# Altium PCB PCB1.PcbDoc
Units mil, origin at the board's own origin, x right, y up, seen from the top; angles counter-clockwise.
Board outline 2755.91 x 2755.91 mil, 4 copper layers (Component Side, Ground Plane, Power Plane, Solder Side), stack 33.234 mil thick; 144 components, 134 nets, 828 pads, 0 vias.
Unrouted connection lines stored in the file: 545.
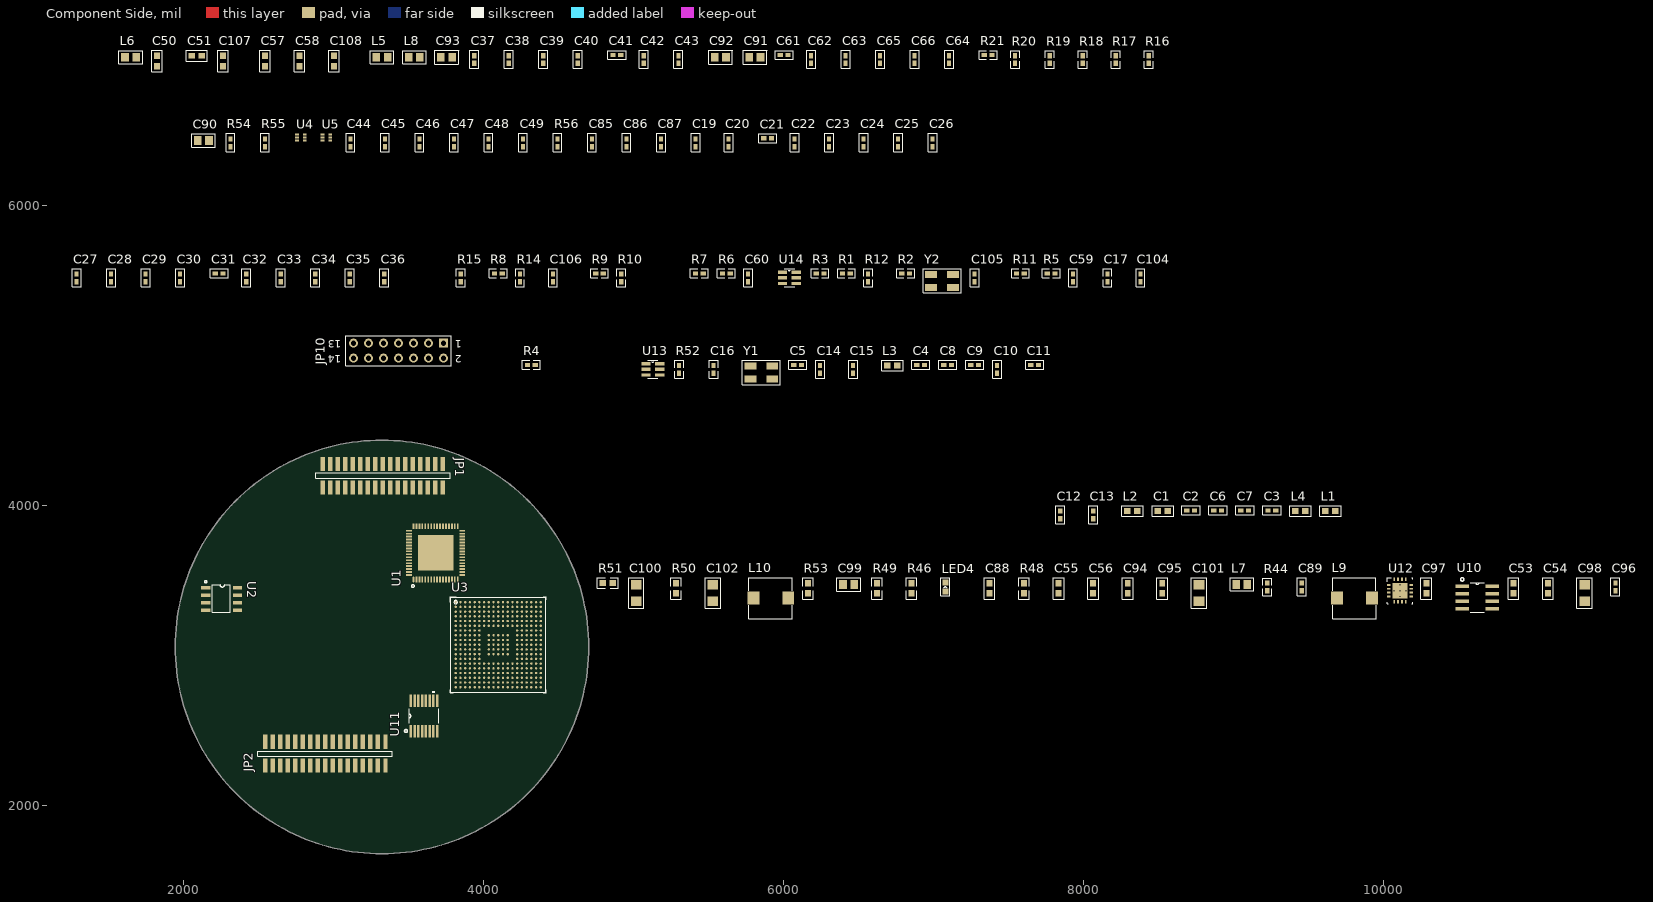
[diagram p0: Component Side view]
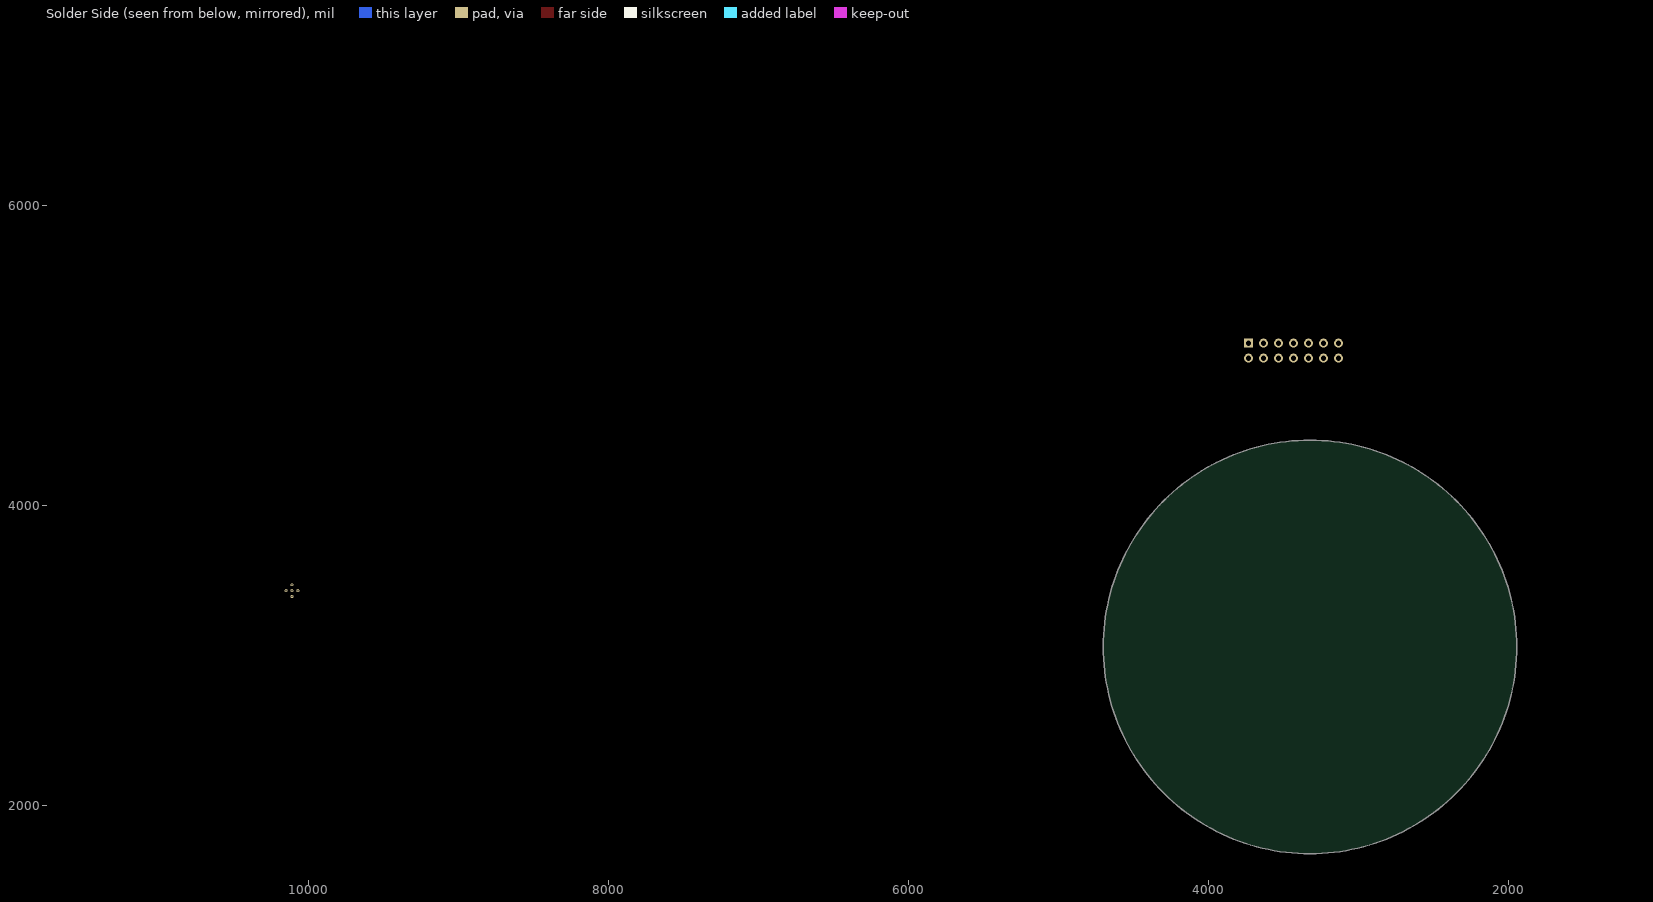
[diagram p1: Solder Side view, seen from below]
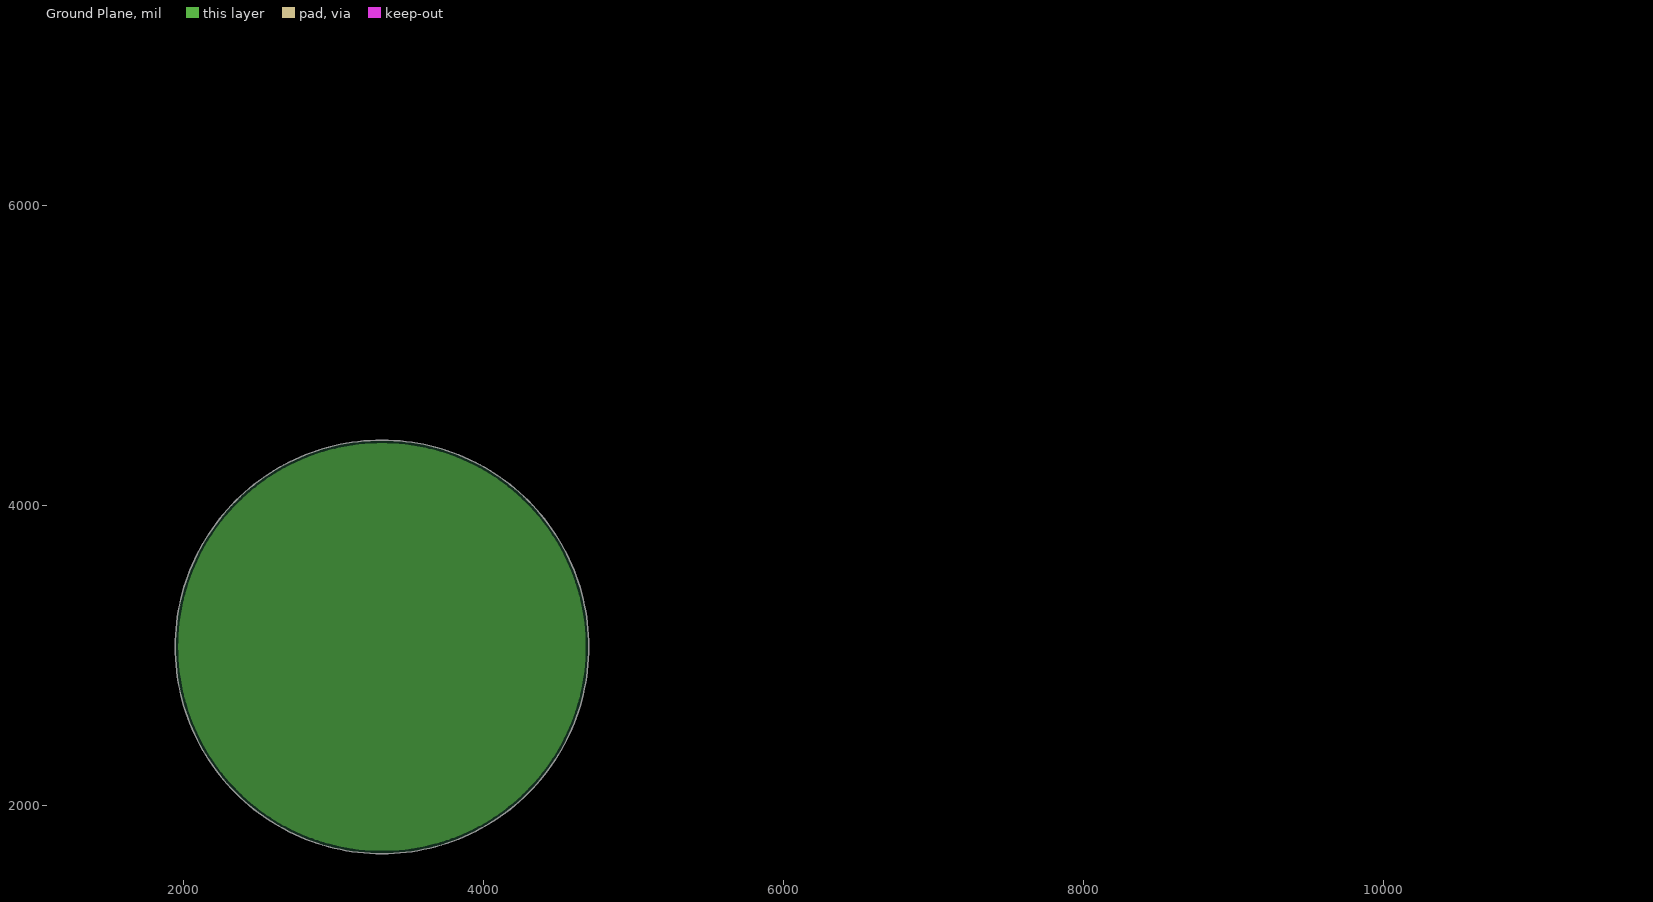
[diagram p2: Ground Plane, clearances drawn from the general rule]
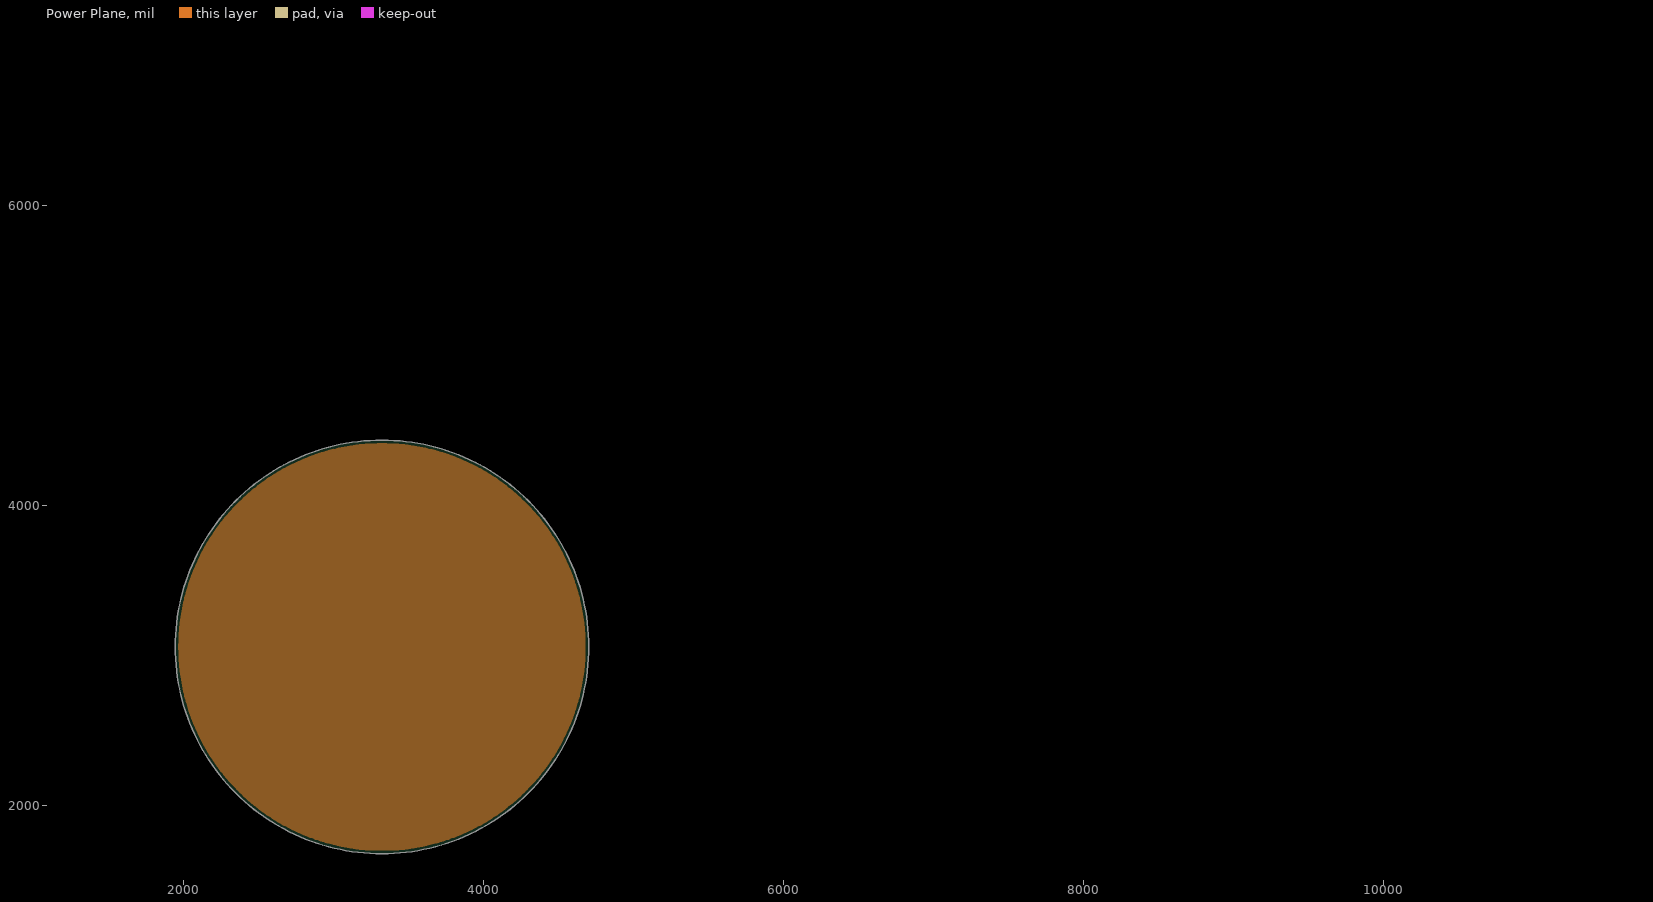
[diagram p3: Power Plane, clearances drawn from the general rule]

## Layer stack, top to bottom
Top Solder: solder mask 0.4, Solder Resist, Dk 3.5
Component Side: signal copper 1.4
Dielectric 1: core 12.6, FR-4, Dk 4.8
Ground Plane: plane copper 1.417
Dielectric 3: prepreg 5, Dk 4.2
Power Plane: plane copper 1.417
Dielectric 4: core 10, Dk 4.2
Solder Side: signal copper 1.4
Bottom Solder: solder mask 0.4, Solder Resist, Dk 3.5

## Board outline
1947.05,3060 ccw(c3325,3060) 3325,1682.05 ccw(c3325,3060) 4702.95,3060 ccw(c3325,3060) 3325,4437.95 ccw(c3325,3060)

## Design rules (kind name [scope] priority, off if disabled: settings)
Clearance [All] p1: gap=5
DiffPairsRouting [All] p1: maxlimit=10 minlimit=10 mostfreqgap=10 toplayer_minwidth=15 toplayer_maxwidth=15 toplayer_prefwidth=15 bottomlayer_minwidth=15 bottomlayer_maxwidth=15 bottomlayer_prefwidth=15 maxuncoupledlength=500
HoleToHoleClearance [All] p1: gap=0 allowstackedmicrovias=TRUE
MinimumSolderMaskSliver [All] p1: minsoldermaskwidth=0
PlaneClearance [All] p1: clearance=20
PlaneConnect [All] p1: planeconnectstyle=Relief reliefexpansion=20 reliefentries=4 reliefconductorwidth=10 reliefairgap=10
PolygonConnect [All] p1: connectstyle=Relief reliefconductorwidth=10 reliefentries=4 polygonreliefangle="90 Angle" airgapwidth=10
RoutingVias [All] p1: holewidth=28 width=50 viastyle="Through Hole" minholewidth=28 minwidth=50 maxholewidth=28 maxwidth=50
SilkToSilkClearance [All] p1: silktosilkclearance=0
SilkToSolderMaskClearance [IsPad] p1: minsilkscreentomaskgap=0 clearancetoexposedcopper=TRUE
SolderMaskExpansion [All] p1: expansion=4
Width [All] p1: maxlimit=40 minlimit=5 preferedwidth=10
23 further rules are at their usual default settings.

## Classes and differential pairs
differential pair RXA: +RXA_P -RXA_N
differential pair RXB: +RXB_P -RXB_N
differential pair TXA: +TXA_P -TXA_N
differential pair TXB: +TXB_P -TXB_N

## Components (designator, comment, footprint, x,y, rotation, side; value= is the part's Value field where it differs from the comment)
C1 "0603B105J6R3NT" CC1608-0603 8530,3965 r0 top
C2 "0402B471J6R3NT" CC1005-0402 8715,3970 r0 top
C3 "0402B104J6R3NT" CC1005-0402 9255,3970 r0 top
C4 "0402B104J6R3NT" CC1005-0402 6915,4940 r0 top
C5 "0402B104J6R3NT" CC1005-0402 6095,4940 r0 top
C6 "0402B104J6R3NT" CC1005-0402 8895,3970 r0 top
C7 "0402B104J6R3NT" CC1005-0402 9075,3970 r0 top
C8 "0402B104J6R3NT" CC1005-0402 7095,4940 r0 top
C9 "0402B104J6R3NT" CC1005-0402 7275,4940 r0 top
C10 "0402B104J6R3NT" CC1005-0402 7425,4910 r90 top
C11 "0402B104J6R3NT" CC1005-0402 7675,4940 r0 top
C12 "0402B104J6R3NT" CC1005-0402 7845,3940 r90 top
C13 "0402B104J6R3NT" CC1005-0402 8065,3940 r90 top
C14 "0402B104J6R3NT" CC1005-0402 6245,4910 r90 top
C15 "0402B104J6R3NT" CC1005-0402 6465,4910 r90 top
C16 "0402B180J6R3NT" CR1005-0402 5535,4910 r90 top
C17 "0402B180J6R3NT" CR1005-0402 8160,5520 r90 top
C19 "0402B104J6R3NT" CC1005-0402 5415,6420 r90 top
C20 "0402B104J6R3NT" CC1005-0402 5635,6420 r90 top
C21 "0402B104J6R3NT" CC1005-0402 5895,6450 r0 top
C22 "0402B104J6R3NT" CC1005-0402 6075,6420 r90 top
C23 "0402B104J6R3NT" CC1005-0402 6305,6420 r90 top
C24 "0402B104J6R3NT" CC1005-0402 6535,6420 r90 top
C25 "0402B104J6R3NT" CC1005-0402 6765,6420 r90 top
C26 "0402B104J6R3NT" CC1005-0402 6995,6420 r90 top
C27 "0402B104J6R3NT" CC1005-0402 1290,5520 r90 top
C28 "0402B104J6R3NT" CC1005-0402 1520,5520 r90 top
C29 "0402B104J6R3NT" CC1005-0402 1750,5520 r90 top
C30 "0402B104J6R3NT" CC1005-0402 1980,5520 r90 top
C31 "0402B104J6R3NT" CC1005-0402 2240,5550 r0 top
C32 "0402B104J6R3NT" CC1005-0402 2420,5520 r90 top
C33 "0402B104J6R3NT" CC1005-0402 2650,5520 r90 top
C34 "0402B104J6R3NT" CC1005-0402 2880,5520 r90 top
C35 "0402B104J6R3NT" CC1005-0402 3110,5520 r90 top
C36 "0402B104J6R3NT" CC1005-0402 3340,5520 r90 top
C37 "0402B104J6R3NT" CC1005-0402 3940,6975 r90 top
C38 "0402B104J6R3NT" CC1005-0402 4170,6975 r90 top
C39 "0402B104J6R3NT" CC1005-0402 4400,6975 r90 top
C40 "0402B104J6R3NT" CC1005-0402 4630,6975 r90 top
C41 "0402B104J6R3NT" CC1005-0402 4890,7005 r0 top
C42 "0402B104J6R3NT" CC1005-0402 5070,6975 r90 top
C43 "0402B104J6R3NT" CC1005-0402 5300,6975 r90 top
C44 "0402B104J6R3NT" CC1005-0402 3115,6420 r90 top
C45 "0402B104J6R3NT" CC1005-0402 3345,6420 r90 top
C46 "0402B104J6R3NT" CC1005-0402 3575,6420 r90 top
C47 "0402B104J6R3NT" CC1005-0402 3805,6420 r90 top
C48 "0402B104J6R3NT" CC1005-0402 4035,6420 r90 top
C49 "0402B104J6R3NT" CC1005-0402 4265,6420 r90 top
C50 "0603B106J6R3NT" CC1608-0603 1825,6965 r90 top
C51 "0603B106J6R3NT" CC1608-0603 2090,7000 r0 top
C53 "0603B225J6R3NT" CC1608-0603 10865,3450 r90 top
C54 "0603B225J6R3NT" CC1608-0603 11095,3450 r90 top
C55 "0603B225J6R3NT" CC1608-0603 7835,3450 r90 top
C56 "0603B225J6R3NT" CC1608-0603 8065,3450 r90 top
C57 "0603B106J6R3NT" CC1608-0603 2545,6965 r90 top
C58 "0603B106J6R3NT" CC1608-0603 2775,6965 r90 top
C59 "0402B150J6R3NT" CC1005-0402 7930,5520 r90 top
C60 "0402B150J6R3NT" CC1005-0402 5765,5520 r90 top
C61 "0402B104J6R3NT" CC1005-0402 6005,7005 r0 top
C62 "0402B104J6R3NT" CC1005-0402 6185,6975 r90 top
C63 "0402B104J6R3NT" CC1005-0402 6415,6975 r90 top
C64 "0402B104J6R3NT" CC1005-0402 7105,6975 r90 top
C65 "0402B104J6R3NT" CC1005-0402 6645,6975 r90 top
C66 "0402B104J6R3NT" CC1005-0402 6875,6975 r90 top
C85 "0402B104J6R3NT" CC1005-0402 4725,6420 r90 top
C86 "0402B104J6R3NT" CC1005-0402 4955,6420 r90 top
C87 "0402B104J6R3NT" CC1005-0402 5185,6420 r90 top
C88 "0603B105J6R3NT" CC1608-0603 7375,3450 r90 top
C89 "0402B104J6R3NT" CC1005-0402 9455,3460 r90 top
C90 "0805B226J6R3NT" CC2012-0805 2135,6435 r0 top
C91 "0805B226J6R3NT" CC2012-0805 5810,6990 r0 top
C92 "0805B226J6R3NT" CC2012-0805 5580,6990 r0 top
C93 "0805B226J6R3NT" CC2012-0805 3755,6990 r0 top
C94 "0603B105J6R3NT" CC1608-0603 8295,3450 r90 top
C95 "0603B105J6R3NT" CC1608-0603 8525,3450 r90 top
C96 "0402B104J6R3NT" CC1005-0402 11545,3460 r90 top
C97 "0603B225J6R3NT" CC1608-0603 10285,3450 r90 top
C98 "1206B156J6R3NT" CC3216-1206 11340,3420 r90 top
C99 "0805B474J6R3NT" CC2012-0805 6435,3475 r0 top
C100 "1206B156J6R3NT" CC3216-1206 5020,3420 r90 top
C101 "1206B226J6R3NT" CC3216-1206 8770,3420 r90 top
C102 "1206B336J6R3NT" CC3216-1206 5530,3420 r90 top
C104 "0402B103J6R3NT" CC1005-0402 8380,5520 r90 top
C105 "0402B104J6R3NT" CC1005-0402 7275,5520 r90 top
C106 "0402B104J6R3NT" CC1005-0402 4465,5520 r90 top
C107 "0603B106J6R3NT" CC1608-0603 2265,6965 r90 top
C108 "0603B106J6R3NT" CC1608-0603 3005,6965 r90 top
JP1 "Header 17X2" DC_1.27_32 3730,4280 r0 top
JP2 "Header 17X2" DC_1.27_32 2548,2270 r180 top
JP10 "JTAG" HDR2X7 3735,5085 r180 top
L1 "BLM18EG221SN1D" BLM0603 9645,3965 r0 top
L2 "BLM18EG221SN1D" BLM0603 8325,3965 r0 top
L3 "BLM18EG221SN1D" BLM0603 6725,4935 r0 top
L4 "BLM18EG221SN1D" BLM0603 9445,3965 r0 top
L5 "BLM21PG221SN1D" BLM0805 3325,6990 r0 top
L6 "BLM21PG600SN1D" BLM0805 1650,6990 r0 top
L7 "BLM21PG600SN1D" BLM0805 9055,3475 r0 top
L8 "BLM21PG221SN1D" BLM0805 3540,6990 r0 top
L9 "RLF7030T-1R0M6R4" RLF7030T 9690,3385 r0 top
L10 "RLF7030T-1R0M6R4" RLF7030T 5800,3385 r0 top
LED4 "LED Chip" 0603D 7080,3430 r90 top
R1 "RC02K1213JT" CR1005-0402 6420,5550 r0 top
R2 "RC02K6103JT" CR1005-0402 6815,5550 r0 top
R3 "RC02K6103JT" CR1005-0402 6245,5550 r0 top
R4 "RC02K6103JT" CR1005-0402 4320,4940 r0 top
R5 "RC02K6103JT" CR1005-0402 7785,5550 r0 top
R6 "RC02K6103JT" CR1005-0402 5620,5550 r0 top
R7 "RC02K6103JT" CR1005-0402 5440,5550 r0 top
R8 "RC02K6103JT" CR1005-0402 4100,5550 r0 top
R9 "RC02K202JT" CR1005-0402 4775,5550 r0 top
R10 "RC02K202JT" CR1005-0402 4920,5520 r90 top
R11 "RC02K390JT" CR1005-0402 7580,5550 r0 top
R12 "RC02K222JT" CR1005-0402 6565,5520 r90 top
R14 "RC02K563JT" CR1005-0402 4245,5520 r90 top
R15 "RC02K563JT" CR1005-0402 3850,5520 r90 top
R16 "RC02K000JT" CR1005-0402 8435,6975 r90 top
R17 "RC02K000JT" CR1005-0402 8215,6975 r90 top
R18 "RC02K000JT" CR1005-0402 7995,6975 r90 top
R19 "RC02K000JT" CR1005-0402 7775,6975 r90 top
R20 "RC02K000JT" CR1005-0402 7545,6975 r90 top
R21 "RC02K000JT" CR1005-0402 7365,7005 r0 top
R44 "RC02K102JT" CR1005-0402 9225,3460 r90 top
R46 "RC03K4R99JT" CR1608-0603 6855,3450 r90 top
R48 "RC03K3162JT" CR1608-0603 7605,3450 r90 top
R49 "RC03K103JT" CR1608-0603 6625,3450 r90 top
R50 "RC03K4991JT" CR1608-0603 5285,3450 r90 top
R51 "RC03K103JT" CR1608-0603 4830,3485 r0 top
R52 "RC02K222JT" CR1005-0402 5305,4910 r90 top
R53 "RC03K331JT" CR1608-0603 6165,3450 r90 top
R54 "RC02K472JT" CC1005-0402 2315,6420 r90 top
R55 "RC02K472JT" CC1005-0402 2545,6420 r90 top
R56 "RC02K220JT" CC1005-0402 4495,6420 r90 top
U1 "LAN9252" LAN9252 3535,3510 r90 top
U2 "24LC16B" "24LC16B SOIC8" 2150,3455 r270 top
U3 "TMS320F28377DZWT" TMS320F28377D 4100,3075 r0 top
U4 "TPD4E001_DRL_6" TPD4E001 2785,6455 r0 top
U5 "TPD4E001_DRL_6" TPD4E001 2955,6455 r0 top
U10 "REF5030_D_8" REF5030 10625,3390 r0 top
U11 "OPA4350_DBQ_16" OPA4350 3605,2600 r90 top
U12 "LM26420Q1" LM26420 10110,3435 r0 top
U13 "TPS3702CX33DDCR" TPS3702 5130,4910 r0 top
U14 "TPS3702CX33DDCR" TPS3702 6040,5520 r0 top
Y1 "25MHz" 7B-20MHz 5780,4845 r0 top
Y2 "XTAL1" 7B-20MHz 6985,5455 r0 top

## Footprints (in the part's own frame and the unit in brackets; to place one, negate y for a bottom-side part, rotate by r counter-clockwise, add the part's x,y. Pads: shape width x height; smd on the part's side, far side on the other; paste and mask are expansions set on the pad)
7B-20MHz [mm]
  rect 2x1.2 smd: 1(0,0) 2(3.7,0) 3(3.7,2.2) 4(0,2.2)
  silkscreen extent -1.37,-0.91 5.05,3.2
"24LC16B SOIC8" [mm]
  rect 0.6x1.55 smd: 1(0,0) 2(1.27,0) 3(2.54,0) 4(3.81,0) 5(3.81,5.4) 6(2.54,5.4) 7(1.27,5.4) 8(0,5.4)
  silkscreen extent -1.18,-0.18 4.19,4.19
0603D [mil]
  rect 40x40 smd: 1(0,0) 2(60,0)
  silkscreen extent -30,-30 90,30
BLM0603 [mm]
  rect 1.1x1 smd: 1(-0.85,0) 2(0.85,0)
  silkscreen extent -1.8,-0.9 1.86,0.9
BLM0805 [mm]
  rect 1.3x1.5 smd: 1(-0.95,0) 2(0.95,0)
  silkscreen extent -1.98,-1.07 2.01,1.14
CC1005-0402 [mm]
  rect 0.9x0.7 smd: 1(-0.65,0) 2(0.65,0)
  silkscreen extent -1.5,-0.75 1.57,0.75
CC1608-0603 [mm]
  rect 1.1x1 smd: 1(-0.85,0) 2(0.85,0)
  silkscreen extent -1.8,-0.9 1.83,0.9
CC2012-0805 [mm]
  rect 1.3x1.5 smd: 1(-0.95,0) 2(0.95,0)
  silkscreen extent -2,-1.15 2.03,1.15
CC3216-1206 [mm]
  rect 1.6x1.8 smd: 1(-1.4,0) 2(1.4,0)
  silkscreen extent -2.6,-1.3 2.59,1.3
CR1005-0402 [mm]
  rect 0.9x0.7 smd: 1(-0.65,0) 2(0.65,0)
  silkscreen extent -1.5,-0.75 1.5,0.75
CR1608-0603 [mm]
  rect 1.1x1 smd: 1(-0.85,0) 2(0.85,0)
  silkscreen extent -1.8,-0.9 1.8,0.9
DC_1.27_32 [mm]
  rect 0.74x2.4 smd: 1(0,0) 2(0,-4.013) 3(-1.27,0) 4(-1.27,-4.013) 5(-2.54,0) 6(-2.54,-4.013) 7(-3.81,0) 8(-3.81,-4.013) 9(-5.08,0) 10(-5.08,-4.013) 11(-6.35,0) 12(-6.35,-4.013) 13(-7.62,0) 14(-7.62,-4.013) 15(-8.89,0) 16(-8.89,-4.013) 17(-10.16,0) 18(-10.16,-4.013) 19(-11.43,0) 20(-11.43,-4.013) 21(-12.7,0) 22(-12.7,-4.013) 23(-13.97,0) 24(-13.97,-4.013) 25(-15.24,0) 26(-15.24,-4.013) 27(-16.51,0) 28(-16.51,-4.013) 29(-17.78,0) 30(-17.78,-4.013) 31(-19.05,0) 32(-19.05,-4.013) 33(-20.32,0) 34(-20.32,-4.013)
  silkscreen extent -21.51,-2.41 1.27,-1.52
HDR2X7 [mm] "Connector; Header; 7x2 Position"
  rect 1.5x1.5 hole 0.9: 1(0,0)
  round 1.5 hole 0.9: 2(0,2.54) 3(2.54,0) 4(2.54,2.54) 5(5.08,0) 6(5.08,2.54) 7(7.62,0) 8(7.62,2.54) 9(10.16,0) 10(10.16,2.54) 11(12.7,0) 12(12.7,2.54) 13(15.24,0) 14(15.24,2.54)
  silkscreen extent -1.27,-1.27 16.51,3.81
LAN9252 [mm]
  oct 1x0.3 smd: 1(0,0)
  rect 1x0.3 smd: 2(0,-0.5) 3(0,-1) 4(0,-1.5) 5(0,-2) 6(0,-2.5) 7(0,-3) 8(0,-3.5) 9(0,-4) 10(0,-4.5) 11(0,-5) 12(0,-5.5) 13(0,-6) 14(0,-6.5) 15(0,-7) 16(0,-7.5) 33(9,-7.5) 34(9,-7) 35(9,-6.5) 36(9,-6) 37(9,-5.5) 38(9,-5) 39(9,-4.5) 40(9,-4) 41(9,-3.5) 42(9,-3) 43(9,-2.5) 44(9,-2) 45(9,-1.5) 46(9,-1) 47(9,-0.5) 48(9,0)
  rect 0.3x1 smd: 17(0.75,-8.25) 18(1.25,-8.25) 19(1.75,-8.25) 20(2.25,-8.25) 21(2.75,-8.25) 22(3.25,-8.25) 23(3.75,-8.25) 24(4.25,-8.25) 25(4.75,-8.25) 26(5.25,-8.25) 27(5.75,-8.25) 28(6.25,-8.25) 29(6.75,-8.25) 30(7.25,-8.25) 31(7.75,-8.25) 32(8.25,-8.25) 49(8.25,0.75) 50(7.75,0.75) 51(7.25,0.75) 52(6.75,0.75) 53(6.25,0.75) 54(5.75,0.75) 55(5.25,0.75) 56(4.75,0.75) 57(4.25,0.75) 58(3.75,0.75) 59(3.25,0.75) 60(2.75,0.75) 61(2.25,0.75) 62(1.75,0.75) 63(1.25,0.75) 64(0.75,0.75)
  rect 6x6 smd: 65(4.5,-3.75)
  silkscreen extent -1.35,-0.13 -0.89,0.33
LM26420 [mm]
  rect 0.6x0.3 smd paste-0.102 mask+0.051: 1(-1.9,0.975) 2(-1.9,0.325) 3(-1.9,-0.325) 4(-1.9,-0.975) 9(1.9,-0.975) 10(1.9,-0.325) 11(1.9,0.325) 12(1.9,0.975)
  rect 0.3x0.6 smd paste-0.102 mask+0.051: 5(-0.975,-1.9) 6(-0.325,-1.9) 7(0.325,-1.9) 8(0.975,-1.9) 13(0.975,1.9) 14(0.325,1.9) 15(-0.325,1.9) 16(-0.975,1.9)
  round 0.5 / inner round 1.524 / far side round 0.5 hole 0.203 mask+0.051: 17(-1,0) 17(0,-1) 17(0,0) 17(0,1) 17(1,0)
  rect 2.6x2.6 smd paste-1.287 mask+0.051: 17(0,0)
  silkscreen extent -2.17,-2.17 2.17,2.17
OPA4350 [mil]
  rect 83x16 smd: 1(-102.5,87.5) 2(-102.5,62.5) 3(-102.5,37.5) 4(-102.5,12.5) 5(-102.5,-12.5) 6(-102.5,-37.5) 7(-102.5,-62.5) 8(-102.5,-87.5) 9(102.5,-87.5) 10(102.5,-62.5) 11(102.5,-37.5) 12(102.5,-12.5) 13(102.5,12.5) 14(102.5,37.5) 15(102.5,62.5) 16(102.5,87.5)
  silkscreen extent -110,-98 164,130
REF5030 [mil]
  rect 90x24 smd: 1(-99,75) 2(-99,25) 3(-99,-25) 4(-99,-75) 5(99,-75) 6(99,-25) 7(99,25) 8(99,75)
  silkscreen extent -111,-98 48,131
RLF7030T [mm]
  rect 2x2.2 smd: 1(0,0) 2(5.9,0)
  silkscreen extent -0.74,-3.5 6.62,3.5
TMS320F28377D [mm]
  round 0.4 smd paste+0 mask+0.051: A1(-7.2,7.2) A2(-6.4,7.2) A3(-5.6,7.2) A4(-4.8,7.2) A5(-4,7.2) A6(-3.2,7.2) A7(-2.4,7.2) A8(-1.6,7.2) A9(-0.8,7.2) A10(0,7.2) A11(0.8,7.2) A12(1.6,7.2) A13(2.4,7.2) A14(3.2,7.2) A15(4,7.2) A16(4.8,7.2) A17(5.6,7.2) A18(6.4,7.2) A19(7.2,7.2) B1(-7.2,6.4) B2(-6.4,6.4) B3(-5.6,6.4) B4(-4.8,6.4) B5(-4,6.4) B6(-3.2,6.4) B7(-2.4,6.4) B8(-1.6,6.4) B9(-0.8,6.4) B10(0,6.4) B11(0.8,6.4) B12(1.6,6.4) B13(2.4,6.4) B14(3.2,6.4) B15(4,6.4) B16(4.8,6.4) B17(5.6,6.4) B18(6.4,6.4) B19(7.2,6.4) C1(-7.2,5.6) C2(-6.4,5.6) C3(-5.6,5.6) C4(-4.8,5.6) C5(-4,5.6) C6(-3.2,5.6) C7(-2.4,5.6) C8(-1.6,5.6) C9(-0.8,5.6) C10(0,5.6) C11(0.8,5.6) C12(1.6,5.6) C13(2.4,5.6) C14(3.2,5.6) C15(4,5.6) C16(4.8,5.6) C17(5.6,5.6) C18(6.4,5.6) C19(7.2,5.6) D1(-7.2,4.8) D2(-6.4,4.8) D3(-5.6,4.8) D4(-4.8,4.8) D5(-4,4.8) D6(-3.2,4.8) D7(-2.4,4.8) D8(-1.6,4.8) D9(-0.8,4.8) D10(0,4.8) D11(0.8,4.8) D12(1.6,4.8) D13(2.4,4.8) D14(3.2,4.8) D15(4,4.8) D16(4.8,4.8) D17(5.6,4.8) D18(6.4,4.8) D19(7.2,4.8) E1(-7.2,4) E2(-6.4,4) E3(-5.6,4) E4(-4.8,4) E5(-4,4) E6(-3.2,4) E7(-2.4,4) E8(-1.6,4) E9(-0.8,4) E10(0,4) E11(0.8,4) E12(1.6,4) E13(2.4,4) E14(3.2,4) E15(4,4) E16(4.8,4) E17(5.6,4) E18(6.4,4) E19(7.2,4) F1(-7.2,3.2) F2(-6.4,3.2) F3(-5.6,3.2) F4(-4.8,3.2) F5(-4,3.2) F6(-3.2,3.2) F7(-2.4,3.2) F8(-1.6,3.2) F9(-0.8,3.2) F10(0,3.2) F11(0.8,3.2) F12(1.6,3.2) F13(2.4,3.2) F14(3.2,3.2) F15(4,3.2) F16(4.8,3.2) F17(5.6,3.2) F18(6.4,3.2) F19(7.2,3.2) G1(-7.2,2.4) G2(-6.4,2.4) G3(-5.6,2.4) G4(-4.8,2.4) G5(-4,2.4) G6(-3.2,2.4) G14(3.2,2.4) G15(4,2.4) G16(4.8,2.4) G17(5.6,2.4) G18(6.4,2.4) G19(7.2,2.4) H1(-7.2,1.6) H2(-6.4,1.6) H3(-5.6,1.6) H4(-4.8,1.6) H5(-4,1.6) H6(-3.2,1.6) H8(-1.6,1.6) H9(-0.8,1.6) H10(0,1.6) H11(0.8,1.6) H12(1.6,1.6) H14(3.2,1.6) H15(4,1.6) H16(4.8,1.6) H17(5.6,1.6) H18(6.4,1.6) H19(7.2,1.6) J1(-7.2,0.8) J2(-6.4,0.8) J3(-5.6,0.8) J4(-4.8,0.8) J5(-4,0.8) J6(-3.2,0.8) J8(-1.6,0.8) J9(-0.8,0.8) J10(0,0.8) J11(0.8,0.8) J12(1.6,0.8) J14(3.2,0.8) J15(4,0.8) J16(4.8,0.8) J17(5.6,0.8) J18(6.4,0.8) J19(7.2,0.8) K1(-7.2,0) K2(-6.4,0) K3(-5.6,0) K4(-4.8,0) K5(-4,0) K6(-3.2,0) K8(-1.6,0) K9(-0.8,0) K10(0,0) K11(0.8,0) K12(1.6,0) K14(3.2,0) K15(4,0) K16(4.8,0) K17(5.6,0) K18(6.4,0) K19(7.2,0) L1(-7.2,-0.8) L2(-6.4,-0.8) L3(-5.6,-0.8) L4(-4.8,-0.8) L5(-4,-0.8) L6(-3.2,-0.8) L8(-1.6,-0.8) L9(-0.8,-0.8) L10(0,-0.8) L11(0.8,-0.8) L12(1.6,-0.8) L14(3.2,-0.8) L15(4,-0.8) L16(4.8,-0.8) L17(5.6,-0.8) L18(6.4,-0.8) L19(7.2,-0.8) M1(-7.2,-1.6) M2(-6.4,-1.6) M3(-5.6,-1.6) M4(-4.8,-1.6) M5(-4,-1.6) M6(-3.2,-1.6) M8(-1.6,-1.6) M9(-0.8,-1.6) M10(0,-1.6) M11(0.8,-1.6) M12(1.6,-1.6) M14(3.2,-1.6) M15(4,-1.6) M16(4.8,-1.6) M17(5.6,-1.6) M18(6.4,-1.6) M19(7.2,-1.6) N1(-7.2,-2.4) N2(-6.4,-2.4) N3(-5.6,-2.4) N4(-4.8,-2.4) N5(-4,-2.4) N6(-3.2,-2.4) N14(3.2,-2.4) N15(4,-2.4) N16(4.8,-2.4) N17(5.6,-2.4) N18(6.4,-2.4) N19(7.2,-2.4) P1(-7.2,-3.2) P2(-6.4,-3.2) P3(-5.6,-3.2) P4(-4.8,-3.2) P5(-4,-3.2) P6(-3.2,-3.2) P7(-2.4,-3.2) P8(-1.6,-3.2) P9(-0.8,-3.2) P10(0,-3.2) P11(0.8,-3.2) P12(1.6,-3.2) P13(2.4,-3.2) P14(3.2,-3.2) P15(4,-3.2) P16(4.8,-3.2) P17(5.6,-3.2) P18(6.4,-3.2) P19(7.2,-3.2) R1(-7.2,-4) R2(-6.4,-4) R3(-5.6,-4) R4(-4.8,-4) R5(-4,-4) R6(-3.2,-4) R7(-2.4,-4) R8(-1.6,-4) R9(-0.8,-4) R10(0,-4) R11(0.8,-4) R12(1.6,-4) R13(2.4,-4) R14(3.2,-4) R15(4,-4) R16(4.8,-4) R17(5.6,-4) R18(6.4,-4) R19(7.2,-4) T1(-7.2,-4.8) T2(-6.4,-4.8) T3(-5.6,-4.8) T4(-4.8,-4.8) T5(-4,-4.8) T6(-3.2,-4.8) T7(-2.4,-4.8) T8(-1.6,-4.8) T9(-0.8,-4.8) T10(0,-4.8) T11(0.8,-4.8) T12(1.6,-4.8) T13(2.4,-4.8) T14(3.2,-4.8) T15(4,-4.8) T16(4.8,-4.8) T17(5.6,-4.8) T18(6.4,-4.8) T19(7.2,-4.8) U1(-7.2,-5.6) U2(-6.4,-5.6) U3(-5.6,-5.6) U4(-4.8,-5.6) U5(-4,-5.6) U6(-3.2,-5.6) U7(-2.4,-5.6) U8(-1.6,-5.6) U9(-0.8,-5.6) U10(0,-5.6) U11(0.8,-5.6) U12(1.6,-5.6) U13(2.4,-5.6) U14(3.2,-5.6) U15(4,-5.6) U16(4.8,-5.6) U17(5.6,-5.6) U18(6.4,-5.6) U19(7.2,-5.6) V1(-7.2,-6.4) V2(-6.4,-6.4) V3(-5.6,-6.4) V4(-4.8,-6.4) V5(-4,-6.4) V6(-3.2,-6.4) V7(-2.4,-6.4) V8(-1.6,-6.4) V9(-0.8,-6.4) V10(0,-6.4) V11(0.8,-6.4) V12(1.6,-6.4) V13(2.4,-6.4) V14(3.2,-6.4) V15(4,-6.4) V16(4.8,-6.4) V17(5.6,-6.4) V18(6.4,-6.4) V19(7.2,-6.4) W1(-7.2,-7.2) W2(-6.4,-7.2) W3(-5.6,-7.2) W4(-4.8,-7.2) W5(-4,-7.2) W6(-3.2,-7.2) W7(-2.4,-7.2) W8(-1.6,-7.2) W9(-0.8,-7.2) W10(0,-7.2) W11(0.8,-7.2) W12(1.6,-7.2) W13(2.4,-7.2) W14(3.2,-7.2) W15(4,-7.2) W16(4.8,-7.2) W17(5.6,-7.2) W18(6.4,-7.2) W19(7.2,-7.2)
  silkscreen extent -8.15,-8.15 8.15,8.15
TPD4E001 [mm]
  rect 0.654x0.301 smd: 1(-0.65,0.5) 2(-0.65,0) 3(-0.65,-0.5) 4(0.65,-0.5) 5(0.65,0) 6(0.65,0.5)
TPS3702 [mil]
  rect 62x22 smd paste-4 mask+2: 1(-46,37.4) 2(-46,0) 3(-46,-37.4) 4(46,-37.4) 5(46,0) 6(46,37.4)
  silkscreen extent -34,-60 34,60

## Part data
C1 C2 C3 C4 C5 C6 C7 C8 C9 C10 C11 C12 C13 C14 C15 C16 C17 C19 C20 C21 C22 C23 C24 C25 C26 C27 C28 C29 C30 C31 C32 C33 C34 C35 C36 C37 C38 C39 C40 C41 C42 C43 C44 C45 C46 C47 C48 C49 C50 C51 C53 C54 C55 C56 C57 C58 C59 C60 C61 C62 C63 C64 C65 C66 C85 C86 C87 C88 C89 C90 C91 C92 C93 C94 C95 C96 C97 C98 C99 C100 C101 C102 C104 C105 C106 C107 C108: library part CAP
JP1 JP2: "Header, 16-Pin, Dual row"
JP10: library part "Header 7X2", "Header, 7-Pin, Dual row"
L1 L2 L3 L4 L5 L6 L7 L8: library part "Inductor Iron", "Magnetic-Core Inductor"
L9 L10: library part "Inductor Chip", "Inductor"
LED4: "Typical Chip LED"
R1 R2 R3 R4 R5 R6 R7 R8 R9 R10 R11 R12 R14 R15 R16 R17 R18 R19 R20 R21 R44 R46 R48 R49 R50 R51 R52 R53 R54 R55 R56: library part Resistor
U3 U4 U5 U10 U11 U13 U14: "Imported"
U12: library part LM26420Q1XSQ/NOP, "Imported"
Y1: library part XTAL1

## Nets (pads, with @x,y where several pads share a name; then routed paths per layer and width w, separated by ;. In a path a pad name is that pad's centre, name@x,y a point inside that pad or via, vN(x,y) a via of type N, cw(c..) or ccw(c..) an arc to the next point about the centre after c; other vN are vias at no path point)
1V2: C57.1 C102.1 L8.1 L10.2 R50.2 U14.3
3V3: C8.2 C9.2 C10.2 C11.2 C12.2 C13.2 C50.1 C53.1 C55.1 C101.1 C105.1 C106.1 JP1.31 JP1.33 JP10.5 L1.1 L2.1 L3.1 L5.1 L6.1 L7.1 L9.2 LED4.1 R4.2 R9.2 R10.2 R48.2 R52.2 R54.2 R55.1 U1.5 U1.7 U1.14 U1.20 U1.32 U1.37 U1.47 U2.8 U13.3 U13.4 U13.5 U14.4 U14.5
5V0: C98.1 C100.1 JP1.32 JP1.34 R46.1 U12.1 U12.2 U12.11 U12.12 U12.13 U12.16
ADCA0: JP2.3 R16.1
ADCA1: JP2.6 R17.1
ADCA2: JP2.7 R18.1
ADCA3: JP2.4 R19.1
ADCA4: JP2.9 R20.1
ADCA5: JP2.5 R21.1
ADR1: U1.25 U3.A4
ADR2: U1.29 U3.T16
ADR3: U1.26 U3.W17
ADR4: U1.27 U3.V17
CAN_RX: JP1.30 U3.B2
CAN_TX: JP1.29 U3.C2
CAP1: JP2.18 U3.W9
CAP2: JP2.20 U3.V11
CAP3: JP2.16 U3.V9
CHIP_MODE0: JP1.11 R2.1 U1.48
CHIP_MODE1: JP1.13 R3.1 U1.46
CS: U1.28 U3.U14
DATA0: U1.17 U3.B11
DATA1: U1.13 U3.C14
DATA2: U1.12 U3.B14
DATA3: U1.35 U3.A14
DATA4: U1.49 U3.D15
DATA5: U1.50 U3.C15
DATA6: U1.36 U3.B15
DATA7: U1.39 U3.A15
DATA8: U1.40 U3.C16
DATA9: U1.19 U3.D16
DATA10: U1.23 U3.C17
DATA11: U1.22 U3.A16
DATA12: R14.2 U1.21 U3.B16
DATA13: U1.16 U3.B17
DATA14: U1.15 U3.A17
DATA15: U1.33 U3.B18
DC_CAL: JP1.17 U3.D1
DIGIN1: JP2.13 U3.V8
DIGIN2: JP2.29 U3.W16
DIGIN3: JP2.15 U3.V10
DIGIN4: JP2.31 U3.W18
DIGIN5: JP2.32 U3.V16
DIGIN6: JP2.22 U3.V12
DIGOUT1: JP2.17 U3.W10
DIGOUT2: JP2.19 U3.W11
EEPSIZE: R4.1 R5.1 U1.45
EESCL: R10.1 U1.43 U2.6
EESDA: R9.1 U1.42 U2.5
EMU0: JP10.13 R54.1
EMU1: JP10.14 R55.2
EN_GATE: JP1.27 U3.A2
ERROR: U3.U19
FXLOSEN: R6.1 U1.8
FXSDA: R7.1 U1.9
FXSDB: R8.1 U1.10
GND: C1.2 C2.2 C3.1 C4.1 C5.1 C6.1 C7.1 C8.1 C9.1 C10.1 C11.1 C12.1 C13.1 C14.1 C15.1 C16.1 C17.1 C19.1 C20.1 C21.1 C22.1 C23.1 C24.1 C25.1 C26.1 C27.1 C28.1 C29.1 C30.1 C31.1 C32.1 C33.1 C34.1 C35.1 C36.1 C37.2 C38.2 C39.2 C40.2 C41.2 C42.2 C43.2 C44.1 C45.1 C46.1 C47.1 C48.1 C49.1 C50.2 C51.2 C53.2 C54.2 C55.2 C56.2 C57.2 C58.2 C61.1 C62.1 C63.1 C64.1 C65.1 C66.1 C85.1 C86.1 C87.1 C88.1 C89.1 C90.1 C91.1 C92.1 C93.1 C94.1 C95.1 C96.1 C97.1 C98.2 C99.1 C100.2 C101.2 C102.2 C104.2 C105.2 C106.2 C107.2 C108.2 JP1.9 JP1.10 JP2.33 JP2.34 JP10.4 JP10.8 JP10.10 JP10.12 R1.1 R2.2 R3.2 R5.2 R6.2 R7.2 R8.2 R12.1 R49.2 R51.2 R53.1 U1.4 U1.41 U1.65 U2.1 U2.2 U2.3 U2.4 U2.7 U3.A1 U3.A10 U3.A19 U3.E5 U3.E6 U3.E8 U3.E12 U3.E14 U3.E15 U3.F5 U3.F6 U3.F8 U3.F12 U3.F14 U3.F15 U3.G16 U3.G17 U3.H8 U3.H9 U3.H10 U3.H11 U3.H12 U3.H14 U3.H15 U3.J5 U3.J6 U3.J8 U3.J9 U3.J10 U3.J11 U3.J12 U3.K8 U3.K9 U3.K10 U3.K11 U3.K12 U3.K14 U3.K15 U3.L5 U3.L6 U3.L8 U3.L9 U3.L10 U3.L11 U3.L12 U3.L18 U3.M8 U3.M9 U3.M10 U3.M11 U3.M12 U3.M14 U3.M15 U3.N1 U3.N5 U3.N6 U3.P1 U3.P2 U3.P5 U3.P7 U3.P8 U3.P11 U3.P12 U3.P14 U3.P15 U3.R2 U3.R5 U3.R7 U3.R8 U3.R14 U3.R15 U3.V6 U3.V7 U3.W1 U3.W6 U3.W7 U3.W19 U4.3 U5.3 U10.4 U11.13 U12.4 U12.9 U12.14 U12.17 U13.2 U14.2 Y1.2 Y1.4
GPIO84: R15.2 U3.A11
INH_A: JP1.20 U3.C8
INH_B: JP1.21 U3.A7
INH_C: JP1.24 U3.C7
INL_A: JP1.22 U3.D8
INL_B: JP1.23 U3.B7
INL_C: JP1.26 U3.D7
IRQ: U1.44 U3.T11
LED1: JP2.30 U3.U15
LED2: JP2.24 U3.U13
LED3: JP2.21 U3.U12
MCU_1V2: C37.1 C38.1 C39.1 C40.1 C41.1 C42.1 C43.1 C58.1 C108.1 L8.2 U3.E9 U3.E11 U3.F9 U3.F11 U3.G14 U3.G15 U3.J14 U3.J15 U3.K5 U3.K6 U3.P10 U3.P13 U3.R10 U3.R13
MCU_3V3: C19.2 C20.2 C21.2 C22.2 C23.2 C24.2 C25.2 C26.2 C27.2 C28.2 C29.2 C30.2 C31.2 C32.2 C33.2 C34.2 C35.2 C36.2 C44.2 C45.2 C51.1 C107.1 L5.2 R14.1 R15.1 U3.A9 U3.A18 U3.B1 U3.E7 U3.E10 U3.E13 U3.E16 U3.F4 U3.F7 U3.F10 U3.F13 U3.F16 U3.G4 U3.G5 U3.G6 U3.H5 U3.H6 U3.J18 U3.L14 U3.L15 U3.M1 U3.M5 U3.M6 U3.N14 U3.N15 U3.P9 U3.R9 U3.R11 U3.R12 U3.V19 U3.W8
MCU_TCK: JP2.27 JP10.11 R56.1 U3.V15
MCU_TDI: JP2.23 JP10.3 U3.W13
MCU_TDO: JP2.28 JP10.7 R11.1
MCU_TMS: JP2.26 JP10.1 U3.W14
MCU_TRST: JP2.25 JP10.2 R12.2 U3.V14
NetC16_2: C16.2 U1.1 Y1.1
NetC17_2: C17.2 U1.2 Y1.3
NetC59_1: C59.1 U3.G19 Y2.1
NetC60_1: C60.1 U3.J19 Y2.3
NetC61_2: C61.2 R21.2 U3.T3 U4.1
NetC62_2: C62.2 R17.2 U3.T1 U4.2
NetC63_2: C63.2 R19.2 U3.T2 U4.4
NetC64_2: C64.2 R16.2 U3.U1 U5.4
NetC65_2: C65.2 R20.2 U3.U3 U5.1
NetC66_2: C66.2 R18.2 U3.U2 U5.2
NetC88_2: C88.2 U10.5
NetC94_2: C94.2 R44.1 U10.6
NetC99_2: C99.2 R46.2 U12.15
NetL9_1: L9.1 U12.3
NetL10_1: L10.1 U12.10
NetLED4_2: LED4.2 R53.2
NetR1_2: R1.2 U1.57
NetR11_2: R11.2 U3.W15
NetR48_1: R48.1 R49.1 U12.5
NetR50_1: R50.1 R51.1 U12.8
NFAULT: JP1.18 U3.D2
NOCTW: JP1.19 U3.C1
OSC_GND: C59.2 C60.2 U3.H18 U3.H19 Y2.2 Y2.4
OSC_MCU_3V3: C48.2 C49.2 C56.1 L7.2 U3.H16 U3.H17
QEP1A: JP2.12 U3.R18
QEP1B: JP2.14 U3.R19
QEP1I: JP2.8 U3.P17
QEP1S: JP2.10 U3.P16
RD: U1.31 U3.U16
REF3V0: C95.2 R44.2 U11.3 U11.5 U11.12 U11.14
RST: C104.1 R52.1 U1.11 U3.F19 U13.1 U14.1
RXA_N: JP1.3 U1.54
RXA_P: JP1.1 U1.55
RXB_N: JP1.4 U1.61
RXB_P: JP1.2 U1.60
SCI_RXD: JP1.28 U3.A3
SCI_TXD: JP1.25 U3.B4
SPIA_CLK: JP1.14 U3.E3
SPIA_CS: JP1.15 U3.E4
SPIA_SIMO: JP1.16 U3.E1
SPIA_SOMI: JP1.12 U3.E2
SYNC0: U1.34 U3.D6
SYNC1: U1.18 U3.B19
TCK_RET: JP10.9 R56.2
TXA_N: JP1.7 U1.52
TXA_P: JP1.5 U1.53
TXB_N: JP1.8 U1.63
TXB_P: JP1.6 U1.62
VDD12TX1: C6.2 C7.2 L4.2 U1.56 U1.59
VDD33BIAS: C5.2 L3.2 U1.58
VDD33TXRX1: C3.2 L1.2 U1.51
VDD33TXRX2: C4.2 L2.2 U1.64
VDDA_MCU_3V3: C46.2 C47.2 C54.1 C85.2 C86.2 C87.2 C89.2 C96.2 C97.2 L6.2 U3.P6 U3.R6 U4.6 U5.6 U10.2 U11.4
VDDCR: C1.1 C2.1 C14.2 C15.2 L4.1 U1.6 U1.24 U1.38
VREFHIA: C90.2 U3.V1 U11.10 U11.11
VREFHIB: C91.2 U3.W5 U11.1 U11.2
VREFHIC: C92.2 U3.R1 U11.15 U11.16
VREFHID: C93.2 U3.V5 U11.6 U11.7
WR: U1.30 U3.U11
pads on no net: JP2.1 JP2.2 JP2.11 JP10.6 U1.3 U3.A5 U3.A6 U3.A8 U3.A12 U3.A13 U3.B3 U3.B5 U3.B6 U3.B8 U3.B9 U3.B10 U3.B12 U3.B13 U3.C3 U3.C4 U3.C5 U3.C6 U3.C9 U3.C10 U3.C11 U3.C12 U3.C13 U3.C18 U3.C19 U3.D3 U3.D4 U3.D5 U3.D9 U3.D10 U3.D11 U3.D12 U3.D13 U3.D14 U3.D17 U3.D18 U3.D19 U3.E17 U3.E18 U3.E19 U3.F1 U3.F2 U3.F3 U3.F17 U3.F18 U3.G1 U3.G2 U3.G3 U3.G18 U3.H1 U3.H2 U3.H3 U3.H4 U3.J1 U3.J2 U3.J3 U3.J4 U3.J16 U3.J17 U3.K1 U3.K2 U3.K3 U3.K4 U3.K16 U3.K17 U3.K18 U3.K19 U3.L1 U3.L2 U3.L3 U3.L4 U3.L16 U3.L17 U3.L19 U3.M2 U3.M3 U3.M4 U3.M16 U3.M17 U3.M18 U3.M19 U3.N2 U3.N3 U3.N4 U3.N16 U3.N17 U3.N18 U3.N19 U3.P3 U3.P4 U3.P18 U3.P19 U3.R3 U3.R4 U3.R16 U3.R17 U3.T4 U3.T5 U3.T6 U3.T7 U3.T8 U3.T9 U3.T10 U3.T12 U3.T13 U3.T14 U3.T15 U3.T17 U3.T18 U3.T19 U3.U4 U3.U5 U3.U6 U3.U7 U3.U8 U3.U9 U3.U10 U3.U17 U3.U18 U3.V2 U3.V3 U3.V4 U3.V13 U3.V18 U3.W2 U3.W3 U3.W4 U3.W12 U4.5 U5.5 U10.1 U10.3 U10.7 U10.8 U11.8 U11.9 U12.6 U12.7 U13.6 U14.6

## Polygon pours and split planes (outlines as drawn)
no net on Power Plane (split plane): 273 vertices, not listed, extent 1967.06,1702.06 4682.94,4417.94
no net on Ground Plane (split plane): 273 vertices, not listed, extent 1967.06,1702.06 4682.94,4417.94

## Silkscreen, mask and mechanical layers (free items; w line width, h text height)
Mechanical 1:
  circle w10: c3325,3060 r1377.95
  circle w10: c3325,3060 r295.28

## Text inside footprints (layer, text, board x,y; h text height)
JP10: Top Overlay "13" at 3055,5105 h50 r180; Top Overlay "14" at 3055,5005 h50 r180; Top Overlay "1" at 3855,5105 h50 r180; Top Overlay "2" at 3855,5005 h50 r180